# EAGLE board backplane (EAGLE 6.4), part 1 of 3
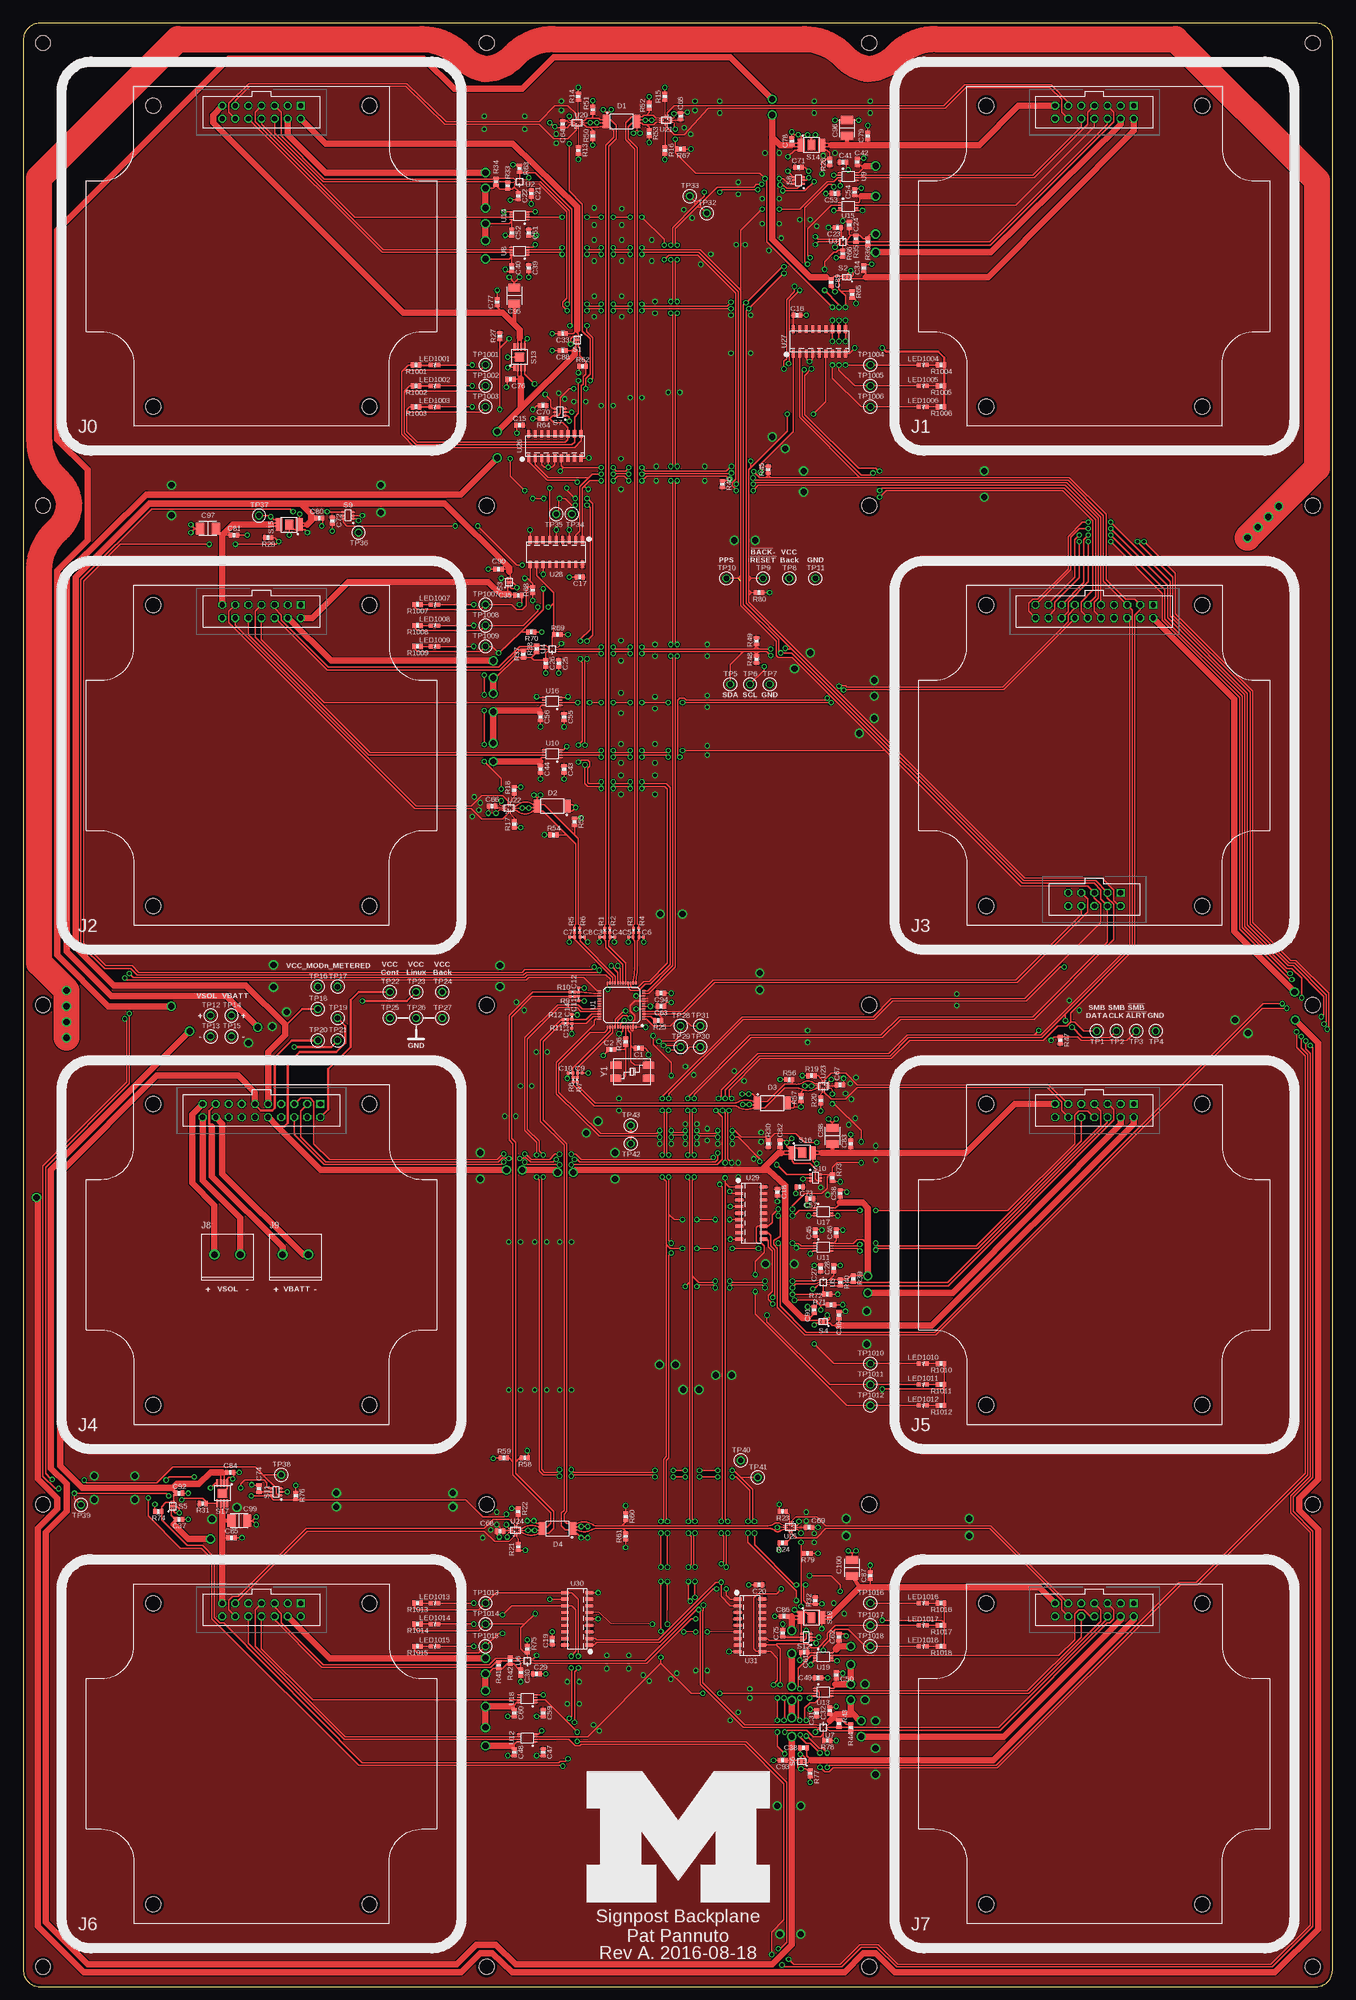
[diagram p0: board, top side]
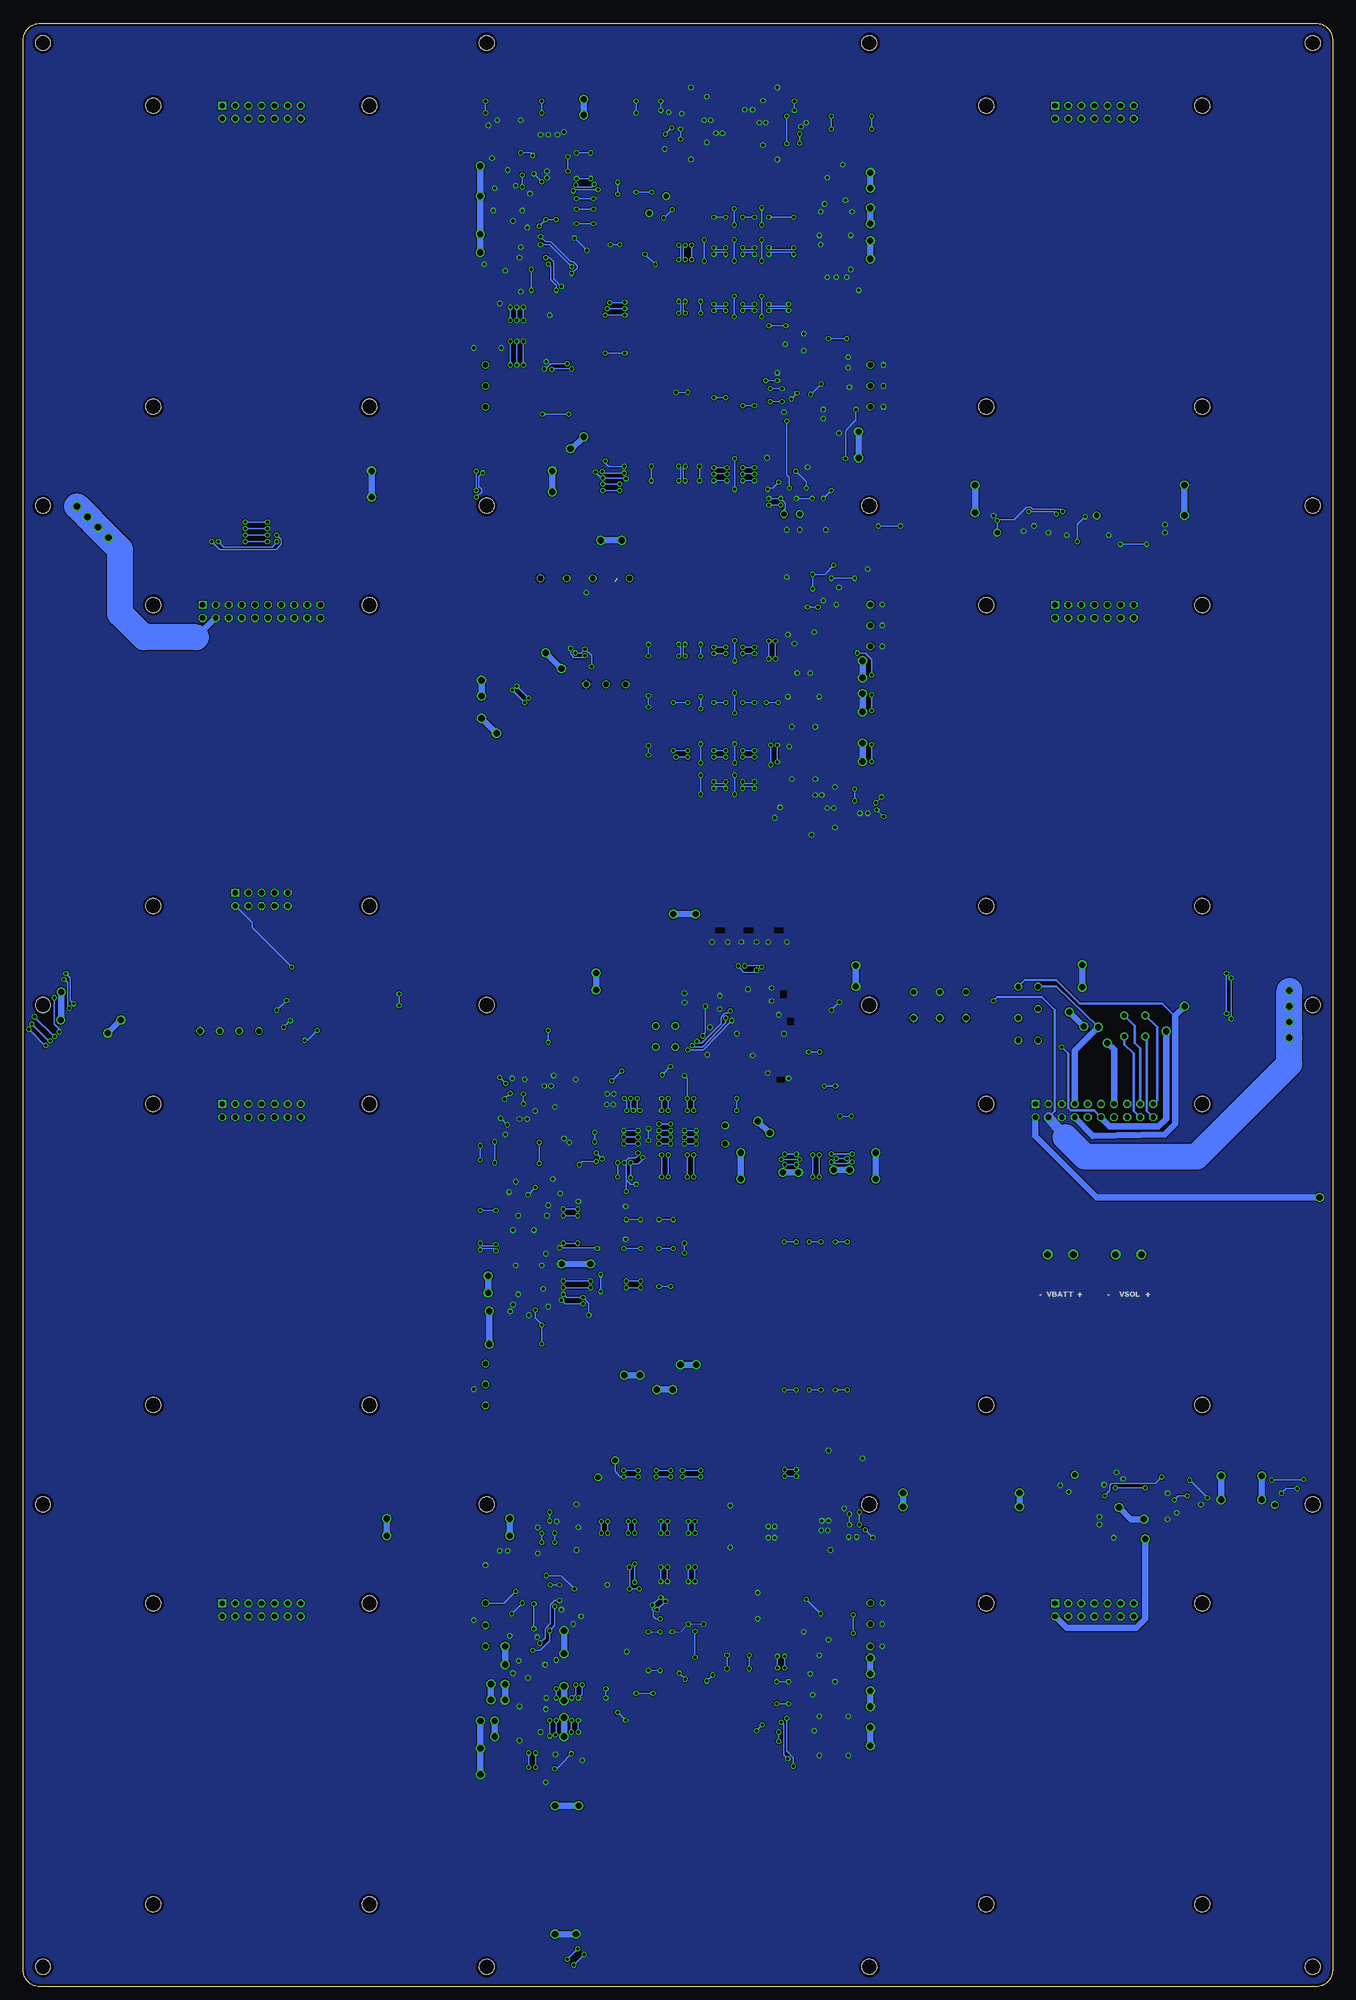
[diagram p1: board, bottom side, seen from below]

Size 254 x 381 mm. Coordinates in mm from the lower left corner, seen from the top.
Outline: 0,377.82 0,3.17 arc90 3.17,0 250.82,0 arc90 254,3.17 254,377.76 arc90 250.76,381 3.17,381 arc90 0,377.82
Copper layers (1*16): Top 0.0178mm / dielectric 59mil / Bottom 0.0178mm
Design rules "sunstone-2lyr_v1.0.0.3 *": minimum track width 6mil, minimum drill 14mil, track to track 6mil, track to pad 6mil, pad to pad 6mil, via to via 6mil, smd to smd 6mil, copper to edge 20mil, drill to drill 16mil, minimum pad ring 8mil, minimum via ring 8mil, stop-mask expansion 3mil, vias tented up to drill 50mil, thermal gap 10mil
Holes 2.95 mm at 3.81,3.81 250.19,3.81 250.19,377.19 3.81,377.19 89.87,377.19 164.13,377.19 3.81,287.38 89.87,287.38 164.13,287.38 250.19,287.38 3.81,190.5 89.87,190.5 164.13,190.5 250.19,190.5 3.81,93.62 89.87,93.62 164.13,93.62 250.19,93.62 89.87,3.81 164.13,3.81
tRestrict: area 120.2,191.5 to 120.5,191.5; area 118,186.1 to 118.1,186.4

## Footprints (pad centres in the part's own frame; a part is rotated, then mirrored left to right if it is on the bottom)
0603_CAP = smd 0.7 x 1: 1 -0.65,0; 2 0.65,0
0402_CAP = smd 0.536 x 0.546: 1 -0.433,0; 2 0.433,0
1210_CAP = smd 2.4 x 1.6: 1 0,1.55; 2 0,-1.55
TSSOP-8 = smd 1.5 x 0.45: 1 -2.9,0.975; 2 -2.9,0.325; 3 -2.9,-0.325; 4 -2.9,-0.975; 5 2.9,-0.975; 6 2.9,-0.325; 7 2.9,0.325; 8 2.9,0.975
BACKPLANE_MODULE_14PIN = drill 1.016 square: 1 7.62,29.21 | drill 1.016 octagon: 2 7.62,26.67; 3 5.08,29.21; 4 5.08,26.67; 5 2.54,29.21; 6 2.54,26.67; 7 0,29.21; 8 0,26.67; 9 -2.54,29.21; 10 -2.54,26.67; 11 -5.08,29.21; 12 -5.08,26.67; 13 -7.62,29.21; 14 -7.62,26.67 | hole 2.946: -20.955,29.21; 20.955,29.21; 20.955,-29.21; -20.955,-29.21
BACKPLANE_MODULE_20PIN_10PIN = drill 1.016 square: 1 11.43,29.21; 21 5.08,-26.67 | drill 1.016 octagon: 2 11.43,26.67; 3 8.89,29.21; 4 8.89,26.67; 5 6.35,29.21; 6 6.35,26.67; 7 3.81,29.21; 8 3.81,26.67; 9 1.27,29.21; 10 1.27,26.67; 11 -1.27,29.21; 12 -1.27,26.67; 13 -3.81,29.21; 14 -3.81,26.67; 15 -6.35,29.21; 16 -6.35,26.67; 17 -8.89,29.21; 18 -8.89,26.67; 19 -11.43,29.21; 20 -11.43,26.67; 22 5.08,-29.21; 23 2.54,-26.67; 24 2.54,-29.21; 25 0,-26.67; 26 0,-29.21; 27 -2.54,-26.67; 28 -2.54,-29.21; 29 -5.08,-26.67; 30 -5.08,-29.21 | hole 2.946: -20.955,29.21; 20.955,29.21; 20.955,-29.21; -20.955,-29.21
BACKPLANE_MODULE_20PIN = drill 1.016 square: 1 11.43,29.21 | drill 1.016 octagon: 2 11.43,26.67; 3 8.89,29.21; 4 8.89,26.67; 5 6.35,29.21; 6 6.35,26.67; 7 3.81,29.21; 8 3.81,26.67; 9 1.27,29.21; 10 1.27,26.67; 11 -1.27,29.21; 12 -1.27,26.67; 13 -3.81,29.21; 14 -3.81,26.67; 15 -6.35,29.21; 16 -6.35,26.67; 17 -8.89,29.21; 18 -8.89,26.67; 19 -11.43,29.21; 20 -11.43,26.67 | hole 2.946: -20.955,29.21; 20.955,29.21; 20.955,-29.21; -20.955,-29.21
PHEONIX-1935161 = drill 1.3: 1 0,0; 2 5,0
LED-0603 = smd 0.8 x 0.8: A 0,-0.75; C 0,0.75
0402_RES-HIGH_SPEED = smd 0.536 x 0.546: 1 -0.433,0; 2 0.433,0
0603-RES = smd 0.7 x 1: 1 -0.65,0; 2 0.65,0
TDFN4 = smd 0.3 x 0.55: 1 -0.25,-0.725; 2 0.25,-0.725; 3 0.25,0.725; 4 -0.25,0.725 | smd 0.86 x 0.5: PAD 0,0
SC70-6 = smd 0.4 x 0.5: 1 -0.65,-0.95; 2 0,-0.95; 3 0.65,-0.95; 4 0.65,0.95; 5 0,0.95; 6 -0.65,0.95
MSOP-8EP = smd 0.45 x 1.35: 1 -0.975,-1.975; 2 -0.325,-1.975; 3 0.325,-1.975; 4 0.975,-1.975; 5 0.975,1.975; 6 0.325,1.975; 7 -0.325,1.975; 8 -0.975,1.975 | smd 2 x 1.7: PAD 0,0
TESTPOINT_0.040IN = drill 1.016: TESTPOINT 0,0
LQFP-48 = smd 0.3 x 0.6: 1 -2.75,-4.3; 2 -2.25,-4.3; 3 -1.75,-4.3; 4 -1.25,-4.3; 5 -0.75,-4.3; 6 -0.25,-4.3; 7 0.25,-4.3; 8 0.75,-4.3; 9 1.25,-4.3; 10 1.75,-4.3; 11 2.25,-4.3; 12 2.75,-4.3; 25 2.75,4.3; 26 2.25,4.3; 27 1.75,4.3; 28 1.25,4.3; 29 0.75,4.3; 30 0.25,4.3; 31 -0.25,4.3; 32 -0.75,4.3; 33 -1.25,4.3; 34 -1.75,4.3; 35 -2.25,4.3; 36 -2.75,4.3 | smd 0.6 x 0.3: 13 4.3,-2.75; 14 4.3,-2.25; 15 4.3,-1.75; 16 4.3,-1.25; 17 4.3,-0.75; 18 4.3,-0.25; 19 4.3,0.25; 20 4.3,0.75; 21 4.3,1.25; 22 4.3,1.75; 23 4.3,2.25; 24 4.3,2.75; 37 -4.3,2.75; 38 -4.3,2.25; 39 -4.3,1.75; 40 -4.3,1.25; 41 -4.3,0.75; 42 -4.3,0.25; 43 -4.3,-0.25; 44 -4.3,-0.75; 45 -4.3,-1.25; 46 -4.3,-1.75; 47 -4.3,-2.25; 48 -4.3,-2.75
UMLP-8 = smd 0.35 x 0.25: 1 -0.55,0; 5 0.55,0 | smd 0.24 x 0.35: 2 -0.4,-0.625; 3 0,-0.625; 4 0.4,-0.625; 6 0.4,0.625; 7 0,0.625; 8 -0.4,0.625
VFSOP-8 = smd 0.25 x 0.75: 1 -0.75,-1.55; 2 -0.25,-1.55; 3 0.25,-1.55; 4 0.75,-1.55; 5 0.75,1.55; 6 0.25,1.55; 7 -0.25,1.55; 8 -0.75,1.55
UQFN-10 = smd 0.2 x 0.9: 1 -0.2,-0.65 | smd 0.2 x 0.8: 2 0.2,-0.7; 6 0.2,0.7; 7 -0.2,0.7 | smd 0.8 x 0.2: 3 0.9,-0.4; 4 0.9,0; 5 0.9,0.4; 8 -0.9,0.4; 9 -0.9,0; 10 -0.9,-0.4
SOIC-18 = smd 0.635 x 1.524: 1 -5.08,-2.362; 2 -3.81,-2.362; 3 -2.54,-2.362; 4 -1.27,-2.362; 5 0,-2.362; 6 1.27,-2.362; 7 2.54,-2.362; 8 3.81,-2.362; 9 5.08,-2.362; 10 5.08,2.362; 11 3.81,2.362; 12 2.54,2.362; 13 1.27,2.362; 14 0,2.362; 15 -1.27,2.362; 16 -2.54,2.362; 17 -3.81,2.362; 18 -5.08,2.362
ABMM = smd 2.21 x 1.397: 1 -3.167,-1.27; 3 3.15,1.27; NC1 -3.15,1.27; NC2 3.15,-1.27

## Placement (x,y rotation side)
C1  22pF, 5% tol  [0603_CAP]  119.38,182.12 180 top
C2  22pF, 5% tol  [0603_CAP]  114.05,181.86 0 top
C3  22pF  [0402_CAP]  112.27,203.71 180 top
C4  22pF  [0402_CAP]  114.3,203.71 0 top
C5  22pF  [0402_CAP]  117.86,203.71 180 top
C6  22pF  [0402_CAP]  119.89,203.71 0 top
C7  22pF  [0402_CAP]  106.43,203.71 180 top
C8  22pF  [0402_CAP]  108.46,203.71 0 top
C9  22pF  [0402_CAP]  107.95,177.29 0 top
C10  22pF  [0402_CAP]  106.17,177.29 180 top
C11  22pF  [0402_CAP]  107.7,191.77 270 top
C12  22pF  [0402_CAP]  107.7,193.42 90 top
C13  22pF  [0402_CAP]  106.43,186.44 270 top
C14  22pF  [0402_CAP]  106.43,188.21 90 top
C15  100nF  [0603_CAP]  96.27,303.02 180 top
C16  100nF  [0603_CAP]  150.11,324.36 0 top
C17  100nF  [0603_CAP]  107.95,273.56 180 top
C18  100nF  [0603_CAP]  146.3,154.18 270 top
C19  100nF  [0603_CAP]  102.62,67.06 90 top
C20  100nF  [0603_CAP]  142.75,77.98 180 top
C21  100nF  [0603_CAP]  98.55,347.98 270 top
C22  100nF  [0603_CAP]  96.01,347.47 270 top
C23  100nF  [0603_CAP]  157.99,341.38 180 top
C24  100nF  [0603_CAP]  160.27,341.88 90 top
C25  100nF  [0603_CAP]  103.89,256.79 270 top
C26  100nF  [0603_CAP]  101.35,256.79 270 top
C27  100nF  [0603_CAP]  154.69,139.45 90 top
C28  100nF  [0603_CAP]  157.23,139.45 90 top
C29  100nF  [0603_CAP]  99.57,60.71 0 top
C30  100nF  [0603_CAP]  96.52,60.96 270 top
C31  100nF  [0603_CAP]  153.92,53.09 90 top
C32  100nF  [0603_CAP]  156.46,53.59 90 top
C33  100nF  [0603_CAP]  104.65,320.8 180 top
C34  100nF  [0603_CAP]  163.07,333.5 90 top
C35  100nF  [0603_CAP]  96.01,270 0 top
C36  100nF  [0603_CAP]  158.24,130.3 90 top
C37  100nF  [0603_CAP]  30.23,90.68 0 top
C38  100nF  [0603_CAP]  151.38,46.35 180 top
C39  100nF  [0603_CAP]  98.04,333.5 270 top
C40  100nF  [0603_CAP]  94.74,333.5 270 top
C41  100nF  [0603_CAP]  159,354.08 0 top
C42  100nF  [0603_CAP]  161.8,354.08 90 top
C43  100nF  [0603_CAP]  104.9,236.22 270 top
C44  100nF  [0603_CAP]  100.33,236.22 270 top
C45  100nF  [0603_CAP]  153.67,146.3 90 top
C46  100nF  [0603_CAP]  157.73,146.3 90 top
C47  100nF  [0603_CAP]  100.84,45.47 270 top
C48  100nF  [0603_CAP]  95.25,45.47 270 top
C49  100nF  [0603_CAP]  154.18,59.94 0 top
C50  100nF  [0603_CAP]  157.73,60.45 90 top
C51  100nF  [0603_CAP]  98.04,340.36 270 top
C52  100nF  [0603_CAP]  94.74,340.36 270 top
C53  100nF  [0603_CAP]  157.48,347.98 180 top
C54  100nF  [0603_CAP]  161.29,348.23 90 top
C55  100nF  [0603_CAP]  104.9,246.38 270 top
C56  100nF  [0603_CAP]  100.33,246.38 270 top
C57  100nF  [0603_CAP]  152.65,152.91 180 top
C58  100nF  [0603_CAP]  158.5,153.92 90 top
C59  100nF  [0603_CAP]  100.84,53.09 270 top
C60  100nF  [0603_CAP]  95.25,53.09 270 top
C61  100nF  [0603_CAP]  151.51,64.9 180 top
C62  100nF  [0603_CAP]  158.24,67.82 90 top
C63  100nF  [0603_CAP]  123.7,190.25 180 top
C64  100nF  [0603_CAP]  104.65,361.44 90 top
C65  100nF  [0603_CAP]  127.51,362.97 270 top
C66  100nF  [0603_CAP]  90.93,229.11 0 top
C67  100nF  [0603_CAP]  158.47,175.01 180 top
C68  100nF  [0603_CAP]  92.46,88.39 0 top
C69  100nF  [0603_CAP]  152.4,89.15 180 top
C70  100nF  [0603_CAP]  100.84,306.83 180 top
C71  100nF  [0603_CAP]  150.37,353.06 0 top
C72  100nF  [0603_CAP]  59.94,284.48 270 top
C73  100nF  [0603_CAP]  150.62,155.19 180 top
C74  100nF  [0603_CAP]  45.72,96.65 90 top
C75  100nF  [0603_CAP]  147.32,68.58 90 top
C76  100nF  [0603_CAP]  94.49,311.91 180 top
C77  100nF  [0603_CAP]  91.95,326.9 90 top
C78  100nF  [0603_CAP]  149.1,358.14 90 top
C79  100nF  [0603_CAP]  163.83,359.16 90 top
C80  100nF  [0603_CAP]  57.4,284.99 0 top
C81  100nF  [0603_CAP]  40.89,281.69 0 top
C82  100nF  [0603_CAP]  146.81,163.58 90 top
C83  100nF  [0603_CAP]  160.53,163.58 90 top
C84  100nF  [0603_CAP]  40.13,99.82 0 top
C85  100nF  [0603_CAP]  40.39,87.12 0 top
C86  100nF  [0603_CAP]  147.57,71.88 180 top
C87  100nF  [0603_CAP]  164.34,79.76 90 top
C88  4.7uF  [0603_CAP]  104.65,317.5 180 top
C89  4.7uF  [0603_CAP]  156.72,330.71 270 top
C90  4.7uF  [0603_CAP]  92.2,275.08 180 top
C91  4.7uF  [0603_CAP]  153.42,131.32 90 top
C92  4.7uF  [0603_CAP]  30.23,95.76 0 top
C93  4.7uF  [0603_CAP]  147.32,43.94 180 top
C94  4.7uF  [0603_CAP]  123.7,192.79 180 top
C95  150uF  [1210_CAP]  95.25,328.17 180 top
C96  150uF  [1210_CAP]  159.77,360.68 180 top
C97  150uF  [1210_CAP]  35.81,282.96 270 top
C98  150uF  [1210_CAP]  156.97,165.1 180 top
C99  150uF  [1210_CAP]  41.91,90.42 90 top
C100  150uF  [1210_CAP]  160.78,81.28 180 top
D1  SN75240-TSSOP  [TSSOP-8]  116.08,361.95 0 top
D2  SN75240-TSSOP  [TSSOP-8]  102.62,229.11 180 top
D3  SN75240-TSSOP  [TSSOP-8]  145.29,171.45 0 top
D4  SN75240-TSSOP  [TSSOP-8]  103.63,88.9 180 top
J0  BACKPLANE_GENERIC_MODULE  [BACKPLANE_MODULE_14PIN]  46.2,335.81 0 top
J1  BACKPLANE_GENERIC_MODULE  [BACKPLANE_MODULE_14PIN]  207.8,335.81 0 top
J2  BACKPLANE_GENERIC_MODULE  [BACKPLANE_MODULE_14PIN]  46.2,238.94 0 top
J3  BACKPLANE_CONTROLLER_MODULE  [BACKPLANE_MODULE_20PIN_10PIN]  207.8,238.94 0 top
J4  BACKPLANE_POWER_MODULE  [BACKPLANE_MODULE_20PIN]  46.2,142.06 0 top
J5  BACKPLANE_GENERIC_MODULE  [BACKPLANE_MODULE_14PIN]  207.8,142.06 0 top
J6  BACKPLANE_GENERIC_MODULE  [BACKPLANE_MODULE_14PIN]  46.2,45.19 0 top
J7  BACKPLANE_GENERIC_MODULE  [BACKPLANE_MODULE_14PIN]  207.8,45.19 0 top
J8  SCREW_TERMINAL  [PHEONIX-1935161]  37.08,142.06 0 top
J9  SCREW_TERMINAL  [PHEONIX-1935161]  50.29,142.06 0 top
LED1001  LED0603  [LED-0603]  79.76,314.71 270 top
LED1002  LED0603  [LED-0603]  79.76,310.64 270 top
LED1003  LED0603  [LED-0603]  79.76,306.58 270 top
LED1004  LED0603  [LED-0603]  174.5,314.71 270 top
LED1005  LED0603  [LED-0603]  174.5,310.64 270 top
LED1006  LED0603  [LED-0603]  174.5,306.58 270 top
LED1007  LED0603  [LED-0603]  79.76,268.22 270 top
LED1008  LED0603  [LED-0603]  79.76,264.16 270 top
LED1009  LED0603  [LED-0603]  79.76,260.1 270 top
LED1010  LED0603  [LED-0603]  174.5,120.9 270 top
LED1011  LED0603  [LED-0603]  174.5,116.84 270 top
LED1012  LED0603  [LED-0603]  174.5,112.78 270 top
LED1013  LED0603  [LED-0603]  79.76,74.42 270 top
LED1014  LED0603  [LED-0603]  79.76,70.36 270 top
LED1015  LED0603  [LED-0603]  79.76,66.04 270 top
LED1016  LED0603  [LED-0603]  174.5,74.42 270 top
LED1017  LED0603  [LED-0603]  174.5,70.1 270 top
LED1018  LED0603  [LED-0603]  174.5,66.04 270 top
LOGO1  UMICH_SOLID_GIANT  [UMICH_SOLID_1000MIL]  109.35,16.38 0 top
R1  27Ω  [0402_RES-HIGH_SPEED]  112.78,204.98 90 top
R2  27Ω  [0402_RES-HIGH_SPEED]  113.79,204.98 90 top
R3  27Ω  [0402_RES-HIGH_SPEED]  118.36,204.98 90 top
R4  27Ω  [0402_RES-HIGH_SPEED]  119.38,204.98 90 top
R5  27Ω  [0402_RES-HIGH_SPEED]  106.93,204.98 90 top
R6  27Ω  [0402_RES-HIGH_SPEED]  107.95,204.98 90 top
R7  27Ω  [0402_RES-HIGH_SPEED]  107.44,176.02 270 top
R8  27Ω  [0402_RES-HIGH_SPEED]  106.68,176.02 270 top
R9  27Ω  [0402_RES-HIGH_SPEED]  106.55,192.15 180 top
R10  27Ω  [0402_RES-HIGH_SPEED]  106.55,193.04 180 top
R11  27Ω  [0402_RES-HIGH_SPEED]  105.16,186.94 180 top
R12  27Ω  [0402_RES-HIGH_SPEED]  105.16,187.71 180 top
R13  50Ω  [0603-RES]  107.7,356.36 270 top
R14  50Ω  [0603-RES]  107.7,366.78 90 top
R15  50Ω  [0603-RES]  124.46,366.78 90 top
R16  50Ω  [0603-RES]  124.46,356.36 270 top
R17  50Ω  [0603-RES]  95.25,225.55 270 top
R18  50Ω  [0603-RES]  95.25,232.16 90 top
R19  50Ω  [0603-RES]  152.91,176.78 180 top
R20  50Ω  [0603-RES]  154.69,171.96 270 top
R21  50Ω  [0603-RES]  96.01,85.34 270 top
R22  50Ω  [0603-RES]  96.01,92.2 90 top
R23  50Ω  [0603-RES]  147.32,92.2 180 top
R24  50Ω  [0603-RES]  147.32,86.11 180 top
R25  1.5kΩ  [0603-RES]  123.19,187.45 180 top
R26  1.5kΩ  [0603-RES]  116.84,183.39 90 top
R27  10kΩ  [0603-RES]  92.46,320.29 90 top
R28  10kΩ  [0603-RES]  156.46,354.08 270 top
R29  10kΩ  [0603-RES]  47.5,281.18 180 top
R30  10kΩ  [0603-RES]  144.53,163.58 270 top
R31  10kΩ  [0603-RES]  34.8,93.73 180 top
R32  10kΩ  [0603-RES]  153.67,74.93 90 top
R33  10kΩ  [0603-RES]  93.98,349.5 90 top
R34  10kΩ  [0603-RES]  91.69,350.27 90 top
R35  10kΩ  [0603-RES]  161.54,339.22 270 top
R36  10kΩ  [0603-RES]  163.83,338.58 270 top
R37  10kΩ  [0603-RES]  97.03,258.57 90 top
R38  10kΩ  [0603-RES]  99.57,259.59 90 top
R39  10kΩ  [0603-RES]  161.04,137.41 270 top
R40  10kΩ  [0603-RES]  158.5,136.65 270 top
R41  10kΩ  [0603-RES]  92.2,62.36 90 top
R42  10kΩ  [0603-RES]  94.49,63.25 90 top
R43  10kΩ  [0603-RES]  158.24,51.05 270 top
R44  10kΩ  [0603-RES]  160.53,50.29 270 top
R45  10kΩ  [0603-RES]  144.53,294.39 90 top
R46  10kΩ  [0603-RES]  135.64,291.59 270 top
R47  10kΩ  [0603-RES]  201.17,183.64 270 top
R48  10kΩ  [0603-RES]  142.24,257.56 270 top
R49  10kΩ  [0603-RES]  142.24,261.11 90 top
R50  15kΩ  [0603-RES]  110.49,359.16 90 top
R51  15kΩ  [0603-RES]  110.49,364.24 270 top
R52  15kΩ  [0603-RES]  121.41,365 270 top
R53  15kΩ  [0603-RES]  121.41,359.66 90 top
R54  15kΩ  [0603-RES]  102.87,223.52 0 top
R55  15kΩ  [0603-RES]  106.93,226.06 270 top
R56  15kΩ  [0603-RES]  148.59,176.02 0 top
R57  15kΩ  [0603-RES]  150.88,172.47 90 top
R58  15kΩ  [0603-RES]  97.28,102.62 180 top
R59  15kΩ  [0603-RES]  93.22,102.62 0 top
R60  15kΩ  [0603-RES]  116.84,91.19 270 top
R61  15kΩ  [0603-RES]  116.84,87.38 90 top
R62  10MΩ  [0603-RES]  108.46,314.45 0 top
R63  10MΩ  [0603-RES]  96.27,352.81 270 top
R64  10MΩ  [0603-RES]  100.84,304.29 0 top
R65  10MΩ  [0603-RES]  160.78,328.42 90 top
R66  10MΩ  [0603-RES]  159,336.3 90 top
R67  10MΩ  [0603-RES]  127.51,356.62 180 top
R68  10MΩ  [0603-RES]  98.81,271.02 90 top
R69  10MΩ  [0603-RES]  103.63,262.38 180 top
R70  10MΩ  [0603-RES]  98.55,262.89 180 top
R71  10MΩ  [0603-RES]  156.72,132.33 180 top
R72  10MΩ  [0603-RES]  155.96,134.37 180 top
R73  10MΩ  [0603-RES]  156.97,156.97 90 top
R74  10MΩ  [0603-RES]  26.16,92.2 0 top
R75  10MΩ  [0603-RES]  97.79,65.53 270 top
R76  10MΩ  [0603-RES]  52.83,95.25 270 top
R77  10MΩ  [0603-RES]  152.65,41.4 90 top
R78  10MΩ  [0603-RES]  155.96,47.75 180 top
R79  10MΩ  [0603-RES]  152.15,84.07 180 top
R80  10MΩ  [0603-RES]  142.75,270.51 180 top
R1001  15Ω  [0603-RES]  76.2,314.71 180 top
R1002  15Ω  [0603-RES]  76.2,310.64 180 top
R1003  15Ω  [0603-RES]  76.2,306.58 180 top
R1004  15Ω  [0603-RES]  178.05,314.71 180 top
R1005  15Ω  [0603-RES]  178.05,310.64 180 top
R1006  15Ω  [0603-RES]  178.05,306.58 180 top
R1007  15Ω  [0603-RES]  76.45,268.22 180 top
R1008  15Ω  [0603-RES]  76.45,264.16 180 top
R1009  15Ω  [0603-RES]  76.45,260.1 180 top
R1010  15Ω  [0603-RES]  178.05,120.9 180 top
R1011  15Ω  [0603-RES]  178.05,116.84 180 top
R1012  15Ω  [0603-RES]  178.05,112.78 180 top
R1013  15Ω  [0603-RES]  76.45,74.42 180 top
R1014  15Ω  [0603-RES]  76.45,70.36 180 top
R1015  15Ω  [0603-RES]  76.45,66.04 180 top
R1016  15Ω  [0603-RES]  178.05,74.42 180 top
R1017  15Ω  [0603-RES]  178.05,70.1 180 top
R1018  15Ω  [0603-RES]  178.05,66.04 180 top
S1  SIP3240X  [TDFN4]  107.44,319.53 180 top
S2  SIP3240X  [TDFN4]  159.77,331.72 90 top
S3  SIP3240X  [TDFN4]  94.23,272.54 0 top
S4  SIP3240X  [TDFN4]  155.19,129.03 90 top
S5  SIP3240X  [TDFN4]  28.96,93.22 0 top
S6  SIP3240X  [TDFN4]  151,43.69 90 top
S7  NC7SZ157  [SC70-6]  104.14,305.56 90 top
S8  NC7SZ157  [SC70-6]  150.37,350.52 90 top
S9  NC7SZ157  [SC70-6]  62.99,285.5 90 top
S10  NC7SZ157  [SC70-6]  153.67,156.97 270 top
S11  NC7SZ157  [SC70-6]  49.02,96.01 90 top
S12  NC7SZ157  [SC70-6]  151.89,67.82 90 top
S13  AP2401MP  [MSOP-8EP]  96.27,316.23 0 top
S14  AP2401MP  [MSOP-8EP]  152.91,357.38 270 top
S15  AP2401MP  [MSOP-8EP]  51.56,283.72 90 top
S16  AP2401MP  [MSOP-8EP]  151.13,161.8 270 top
S17  AP2401MP  [MSOP-8EP]  38.61,95.76 180 top
S18  AP2401MP  [MSOP-8EP]  152.91,71.63 270 top
TP1  TEST_POINT_0.040IN  [TESTPOINT_0.040IN]  208.28,185.42 0 top
TP2  TEST_POINT_0.040IN  [TESTPOINT_0.040IN]  212.09,185.42 0 top
TP3  TEST_POINT_0.040IN  [TESTPOINT_0.040IN]  215.9,185.42 0 top
TP4  TEST_POINT_0.040IN  [TESTPOINT_0.040IN]  219.71,185.42 0 top
TP5  TEST_POINT_0.040IN  [TESTPOINT_0.040IN]  137.16,252.73 0 top
TP6  TEST_POINT_0.040IN  [TESTPOINT_0.040IN]  140.97,252.73 0 top
TP7  TEST_POINT_0.040IN  [TESTPOINT_0.040IN]  144.78,252.73 0 top
TP8  TEST_POINT_0.040IN  [TESTPOINT_0.040IN]  148.59,273.3 0 top
TP9  TEST_POINT_0.040IN  [TESTPOINT_0.040IN]  143.51,273.3 0 top
TP10  TEST_POINT_0.040IN  [TESTPOINT_0.040IN]  136.4,273.3 0 top
TP11  TEST_POINT_0.040IN  [TESTPOINT_0.040IN]  153.67,273.3 0 top
TP12  TEST_POINT_0.040IN  [TESTPOINT_0.040IN]  36.32,188.47 0 top
TP13  TEST_POINT_0.040IN  [TESTPOINT_0.040IN]  36.32,184.4 0 top
TP14  TEST_POINT_0.040IN  [TESTPOINT_0.040IN]  40.39,188.47 0 top
TP15  TEST_POINT_0.040IN  [TESTPOINT_0.040IN]  40.39,184.4 0 top
TP16  TEST_POINT_0.040IN  [TESTPOINT_0.040IN]  57.15,194.06 0 top
TP17  TEST_POINT_0.040IN  [TESTPOINT_0.040IN]  60.96,194.06 0 top
TP18  TEST_POINT_0.040IN  [TESTPOINT_0.040IN]  57.15,189.74 0 top
TP19  TEST_POINT_0.040IN  [TESTPOINT_0.040IN]  60.96,187.96 0 top
TP20  TEST_POINT_0.040IN  [TESTPOINT_0.040IN]  57.15,183.64 0 top
TP21  TEST_POINT_0.040IN  [TESTPOINT_0.040IN]  60.96,183.64 0 top
TP22  TEST_POINT_0.040IN  [TESTPOINT_0.040IN]  71.12,193.04 0 top
TP23  TEST_POINT_0.040IN  [TESTPOINT_0.040IN]  76.2,193.04 0 top
TP24  TEST_POINT_0.040IN  [TESTPOINT_0.040IN]  81.28,193.04 0 top
TP25  TEST_POINT_0.040IN  [TESTPOINT_0.040IN]  71.12,187.96 0 top
TP26  TEST_POINT_0.040IN  [TESTPOINT_0.040IN]  76.2,187.96 0 top
TP27  TEST_POINT_0.040IN  [TESTPOINT_0.040IN]  81.28,187.96 0 top
TP28  TEST_POINT_0.040IN  [TESTPOINT_0.040IN]  127.51,186.44 0 top
TP29  TEST_POINT_0.040IN  [TESTPOINT_0.040IN]  127.51,182.37 0 top
TP30  TEST_POINT_0.040IN  [TESTPOINT_0.040IN]  131.32,182.37 0 top
TP31  TEST_POINT_0.040IN  [TESTPOINT_0.040IN]  131.32,186.44 0 top
TP32  TEST_POINT_0.040IN  [TESTPOINT_0.040IN]  132.59,344.17 0 top
TP33  TEST_POINT_0.040IN  [TESTPOINT_0.040IN]  129.29,347.47 0 top
TP34  TEST_POINT_0.040IN  [TESTPOINT_0.040IN]  106.43,285.75 0 top
TP35  TEST_POINT_0.040IN  [TESTPOINT_0.040IN]  103.38,285.75 0 top
TP36  TEST_POINT_0.040IN  [TESTPOINT_0.040IN]  65.02,282.19 180 top
TP37  TEST_POINT_0.040IN  [TESTPOINT_0.040IN]  45.72,285.5 0 top
TP38  TEST_POINT_0.040IN  [TESTPOINT_0.040IN]  50.04,99.31 0 top
TP39  TEST_POINT_0.040IN  [TESTPOINT_0.040IN]  11.18,93.47 180 top
TP40  TEST_POINT_0.040IN  [TESTPOINT_0.040IN]  139.19,102.11 0 top
TP41  TEST_POINT_0.040IN  [TESTPOINT_0.040IN]  142.49,98.81 0 top
TP42  TEST_POINT_0.040IN  [TESTPOINT_0.040IN]  117.86,163.58 180 top
TP43  TEST_POINT_0.040IN  [TESTPOINT_0.040IN]  117.86,167.13 0 top
TP1001  TEST_POINT_0.040IN  [TESTPOINT_0.040IN]  89.66,314.71 0 top
TP1002  TEST_POINT_0.040IN  [TESTPOINT_0.040IN]  89.66,310.64 0 top
TP1003  TEST_POINT_0.040IN  [TESTPOINT_0.040IN]  89.66,306.58 0 top
TP1004  TEST_POINT_0.040IN  [TESTPOINT_0.040IN]  164.34,314.71 0 top
TP1005  TEST_POINT_0.040IN  [TESTPOINT_0.040IN]  164.34,310.64 0 top
TP1006  TEST_POINT_0.040IN  [TESTPOINT_0.040IN]  164.34,306.58 0 top
TP1007  TEST_POINT_0.040IN  [TESTPOINT_0.040IN]  89.66,268.22 0 top
TP1008  TEST_POINT_0.040IN  [TESTPOINT_0.040IN]  89.66,264.16 0 top
TP1009  TEST_POINT_0.040IN  [TESTPOINT_0.040IN]  89.66,260.1 0 top
TP1010  TEST_POINT_0.040IN  [TESTPOINT_0.040IN]  164.34,120.9 0 top
TP1011  TEST_POINT_0.040IN  [TESTPOINT_0.040IN]  164.34,116.84 0 top
TP1012  TEST_POINT_0.040IN  [TESTPOINT_0.040IN]  164.34,112.78 0 top
TP1013  TEST_POINT_0.040IN  [TESTPOINT_0.040IN]  89.66,74.42 0 top
TP1014  TEST_POINT_0.040IN  [TESTPOINT_0.040IN]  89.66,70.36 0 top
TP1015  TEST_POINT_0.040IN  [TESTPOINT_0.040IN]  89.66,66.04 0 top
TP1016  TEST_POINT_0.040IN  [TESTPOINT_0.040IN]  164.34,74.42 0 top
TP1017  TEST_POINT_0.040IN  [TESTPOINT_0.040IN]  164.34,70.1 0 top
TP1018  TEST_POINT_0.040IN  [TESTPOINT_0.040IN]  164.34,66.04 0 top
U1  TUSB2077A  [LQFP-48]  116.08,190.5 90 top
U2  FXMA2102  [UMLP-8]  96.27,350.27 90 top
U3  FXMA2102  [UMLP-8]  159,338.58 270 top
U4  FXMA2102  [UMLP-8]  102.62,259.59 90 top
U5  FXMA2102  [UMLP-8]  155.19,136.65 270 top
U6  FXMA2102  [UMLP-8]  97.79,63.25 90 top
U7  FXMA2102  [UMLP-8]  155.19,50.29 270 top
U8  SN74LVC2T45  [VFSOP-8]  96.27,336.8 90 top
U9  SN74LVC2T45  [VFSOP-8]  160.02,351.28 270 top
U10  SN74LVC2T45  [VFSOP-8]  102.62,239.27 90 top
U11  SN74LVC2T45  [VFSOP-8]  155.19,143.51 270 top
U12  SN74LVC2T45  [VFSOP-8]  97.79,48.26 90 top
U13  SN74LVC2T45  [VFSOP-8]  155.19,57.15 270 top
U14  SN74LVC2T45  [VFSOP-8]  96.27,343.66 90 top
U15  SN74LVC2T45  [VFSOP-8]  160.02,345.44 270 top
U16  SN74LVC2T45  [VFSOP-8]  102.62,249.43 90 top
U17  SN74LVC2T45  [VFSOP-8]  155.19,150.37 270 top
U18  SN74LVC2T45  [VFSOP-8]  97.79,55.88 90 top
U19  SN74LVC2T45  [VFSOP-8]  155.19,64.01 270 top
U20  TS3USB30E  [UQFN-10]  107.44,361.7 0 top
U21  TS3USB30E  [UQFN-10]  124.71,362.2 180 top
U22  TS3USB30E  [UQFN-10]  94.23,228.73 0 top
U23  TS3USB30E  [UQFN-10]  155.19,174.75 180 top
U24  TS3USB30E  [UQFN-10]  95.5,88.52 0 top
U25  TS3USB30E  [UQFN-10]  148.84,89.15 180 top
U26  MCP23008  [SOIC-18]  103.12,298.96 0 top
U27  MCP23008  [SOIC-18]  154.43,319.28 0 top
U28  MCP23008  [SOIC-18]  103.38,278.38 180 top
U29  MCP23008  [SOIC-18]  141.22,150.11 270 top
U30  MCP23008  [SOIC-18]  107.44,71.37 90 top
U31  MCP23008  [SOIC-18]  140.97,70.1 270 top
Y1  ABMM  [ABMM]  118.11,177.55 0 top

## Library data of the parts
C1 C2 = passives; DIGIKEY: 1276-1023-1-ND
C3-C94 R1-R80 R1001-R1018 = passives
C95-C100 = passives; DIGIKEY: 1276-3367-1-ND
D1-D4 = signpost; DIGIKEY: 296-6596-1-ND
J0 J1 J2 J5-J7 = signpost; DIGIKEY: S9195-ND
J3 = signpost; DIGIKEY: S9197-ND , S9194-ND
J4 = signpost; DIGIKEY: S9197-ND
J8 J9 = connector; DIGIKEY: 277-1667-ND
LED1001-LED1018 = leds
LOGO1 = logos
S1-S6 = signpost; DIGIKEY: SIP32402ADNP-T1GE4CT-ND
S7-S12 = signpost; DIGIKEY: NC7SZ157P6XCT-ND
S13-S18 = signpost; DIGIKEY: AP2401MP-13DICT-ND
TP1-TP43 TP1001-TP1018 = headers; DIGIKEY: 5001K-ND
U1 = signpost; DIGIKEY: 296-37871-1-ND
U2-U7 = signpost; DIGIKEY: FXMA2102UMXCT-ND
U8-U19 = signpost; DIGIKEY: 296-17014-1-ND
U20-U25 = signpost; DIGIKEY: 296-24684-1-ND
U26-U31 = signpost; DIGIKEY: MCP23008T-E/SOCT-ND
Y1 = crystals; DIGIKEY: 535-10156-1-ND

## Nets
!BACKPLANE_RESET: J3.22 R80.2 TP9.TESTPOINT U1.6 U26.6 U27.6 U28.6 U29.6 U30.6 U31.6
!SMBALERT: J3.6 J4.6 R47.1 TP3.TESTPOINT
CONT_MOD0_IN: J3.9 U8.2
CONT_MOD0_OUT: J3.10 U14.2
CONT_MOD1_IN: J3.11 U9.2
CONT_MOD1_OUT: J3.12 U15.2
CONT_MOD2_IN: J3.13 U10.2
CONT_MOD2_OUT: J3.14 U16.2
CONT_MOD5_IN: J3.15 U11.2
CONT_MOD5_OUT: J3.16 U17.2
CONT_MOD6_IN: J3.17 U12.2
CONT_MOD6_OUT: J3.18 U18.2
CONT_MOD7_IN: J3.19 U13.2
CONT_MOD7_OUT: J3.20 U19.2
CONT_USB+: J3.27 R25.1 U1.3
CONT_USB-: J3.28 U1.4
GND: C1.1 C2.1 C3.2 C4.2 C5.2 C6.2 C7.2 C8.2 C9.2 C10.2 C11.2 C12.2 C13.2 C14.2 C15.2 C16.2 C17.2 C18.2 C19.2 C20.2 C21.2 C22.2 C23.2 C24.2 C25.2 C26.2 C27.2 C28.2 C29.2 C30.2 C31.2 C32.2 C33.2 C34.2 C35.2 C36.2 C37.2 C38.2 C39.2 C40.2 C41.2 C42.2 C43.2 C44.2 C45.2 C46.2 C47.2 C48.2 C49.2 C50.2 C51.2 C52.2 C53.2 C54.2 C55.2 C56.2 C57.2 C58.2 C59.2 C60.2 C61.2 C62.2 C63.1 C64.1 C65.1 C66.1 C67.1 C68.1 C69.1 C70.2 C71.2 C72.2 C73.2 C74.2 C75.2 C76.2 C77.2 C78.2 C79.2 C80.2 C81.2 C82.2 C83.2 C84.2 C85.2 C86.2 C87.2 C88.2 C89.2 C90.2 C91.2 C92.2 C93.2 C94.1 C95.2 C96.2 C97.2 C98.2 C99.2 C100.2 D1.1 D1.3 D1.5 D1.7 D2.1 D2.3 D2.5 D2.7 D3.1 D3.3 D3.5 D3.7 D4.1 D4.3 D4.5 D4.7 J0.1 J0.14 J1.1 J1.14 J2.1 J2.14 J3.1 J3.21 J4.1 J5.1 J5.14 J6.1 J6.14 J7.1 J7.14 LED1001.C LED1002.C LED1003.C LED1007.C LED1008.C LED1009.C LED1013.C LED1014.C LED1015.C R13.2 R14.2 R15.2 R16.2 R17.2 R18.2 R19.2 R20.2 R21.2 R22.2 R23.2 R24.2 R50.1 R51.1 R52.1 R53.1 R54.1 R55.1 R56.1 R57.1 R58.1 R59.1 R60.1 R61.1 R62.1 R63.1 R64.1 R65.1 R66.1 R67.1 R68.1 R69.1 R70.1 R71.1 R72.1 R73.1 R74.1 R75.1 R76.1 R77.1 R78.1 R79.1 R80.1 R1004.1 R1005.1 R1006.1 R1010.1 R1011.1 R1012.1 R1016.1 R1017.1 R1018.1 S1.2 S1.PAD S2.2 S2.PAD S3.2 S3.PAD S4.2 S4.PAD S5.2 S5.PAD S6.2 S6.PAD S7.2 S8.2 S9.2 S10.2 S11.2 S12.2 S13.1 S13.PAD S14.1 S14.PAD S15.1 S15.PAD S16.1 S16.PAD S17.1 S17.PAD S18.1 S18.PAD TP4.TESTPOINT TP7.TESTPOINT TP11.TESTPOINT TP25.TESTPOINT TP26.TESTPOINT TP27.TESTPOINT U1.5 U1.10 U1.24 U1.43 U1.48 U2.4 U3.4 U4.4 U5.4 U6.4 U7.4 U8.4 U9.4 U10.4 U11.4 U12.4 U13.4 U14.4 U14.5 U15.4 U15.5 U16.4 U16.5 U17.4 U17.5 U18.4 U19.4 U19.5 U20.4 U20.10 U21.4 U21.10 U22.4 U22.10 U23.4 U23.10 U24.4 U24.10 U25.4 U25.10 U26.3 U26.4 U26.5 U26.9 U27.3 U27.4 U27.9 U28.3 U28.5 U28.9 U29.4 U29.9 U30.5 U30.9 U31.9
HUB_!OVRCUR1: R28.1 S14.5 TP33.TESTPOINT U1.12
HUB_!OVRCUR2: R27.1 S13.5 TP35.TESTPOINT U1.16
HUB_!OVRCUR3: R29.1 S15.5 TP37.TESTPOINT U1.20
HUB_!OVRCUR4: R31.1 S17.5 TP39.TESTPOINT U1.25
HUB_!OVRCUR5: U1.29
HUB_!OVRCUR6: R32.1 S18.5 TP41.TESTPOINT U1.33
HUB_!OVRCUR7: R30.1 S16.5 TP43.TESTPOINT U1.37
HUB_!PWRON1: S8.1 TP32.TESTPOINT U1.11
HUB_!PWRON2: S7.1 TP34.TESTPOINT U1.15
HUB_!PWRON3: S9.1 TP36.TESTPOINT U1.19
HUB_!PWRON4: S11.1 TP38.TESTPOINT U1.23
HUB_!PWRON5: U1.28
HUB_!PWRON6: S12.1 TP40.TESTPOINT U1.32
HUB_!PWRON7: S10.1 TP42.TESTPOINT U1.36
HUB_CFG: TP28.TESTPOINT U1.40
HUB_DM1: C6.1 R4.1 U1.13
HUB_DM2: C4.1 R2.1 U1.17
HUB_DM3: C8.1 R6.1 U1.21
HUB_DM4: C12.1 R10.1 U1.26
HUB_DM5: U1.30
HUB_DM6: C14.1 R12.1 U1.34
HUB_DM7: C10.1 R8.1 U1.38
HUB_DP1: C5.1 R3.1 U1.14
HUB_DP2: C3.1 R1.1 U1.18
HUB_DP3: C7.1 R5.1 U1.22
HUB_DP4: C11.1 R9.1 U1.27
HUB_DP5: U1.31
HUB_DP6: C13.1 R11.1 U1.35
HUB_DP7: C9.1 R7.1 U1.39
HUB_PORTDIS: TP30.TESTPOINT U1.42
HUB_PORTPWR: TP29.TESTPOINT U1.41
MOD0_5V: C33.1 J0.2 S1.1
MOD0_5V_METERED: C76.1 C88.1 J4.7 S1.3 S13.2 S13.3 TP16.TESTPOINT
MOD0_D+_HUB-SW: D1.4 R1.2 R50.2 U20.3
MOD0_D-_HUB-SW: D1.2 R2.2 R51.2 U20.5
MOD0_IN: J0.10 U8.7
MOD0_ISO_I2C: R63.2 R1002.2 TP1002.TESTPOINT U2.5 U26.11
MOD0_ISO_POWER: R62.2 R1001.2 S1.4 TP1001.TESTPOINT U26.10
MOD0_ISO_USB: R64.2 R1003.2 S7.6 TP1003.TESTPOINT U20.8 U26.12
MOD0_OUT: J0.8 U14.7
MOD0_PPS: J0.7 U8.6
MOD0_SCL: J0.5 R34.2 U2.6
MOD0_SDA: J0.6 R33.2 U2.7
MOD0_USB+: J0.11 U20.1
MOD0_USB-: J0.12 U20.7
MOD0_USB_!EN: S7.4 S13.4
MOD0_USB_VBUS: C77.1 C95.1 J0.13 S13.6 S13.7
MOD0_VCCIO: C22.1 C40.1 C52.1 J0.4 R33.1 R34.1 U2.8 U8.8 U14.8
MOD1_5V: C34.1 J1.2 S2.1
MOD1_5V_METERED: C78.1 C89.1 J4.8 S2.3 S14.2 S14.3 TP17.TESTPOINT
MOD1_D+_HUB-SW: D1.8 R3.2 R52.2 U21.3
MOD1_D-_HUB-SW: D1.6 R4.2 R53.2 U21.5
MOD1_IN: J1.10 U9.7
MOD1_ISO_I2C: LED1005.A R66.2 TP1005.TESTPOINT U3.5 U27.11
MOD1_ISO_POWER: LED1004.A R65.2 S2.4 TP1004.TESTPOINT U27.10
MOD1_ISO_USB: LED1006.A R67.2 S8.6 TP1006.TESTPOINT U21.8 U27.12
MOD1_OUT: J1.8 U15.7
MOD1_PPS: J1.7 U9.6
MOD1_SCL: J1.5 R36.2 U3.6
MOD1_SDA: J1.6 R35.2 U3.7
MOD1_USB+: J1.11 U21.1
MOD1_USB-: J1.12 U21.7
MOD1_USB_!EN: S8.4 S14.4
MOD1_USB_VBUS: C79.1 C96.1 J1.13 S14.6 S14.7
MOD1_VCCIO: C24.1 C42.1 C54.1 J1.4 R35.1 R36.1 U3.8 U9.8 U15.8
MOD2_5V: C35.1 J2.2 S3.1
MOD2_5V_METERED: C80.1 C90.1 J4.9 S3.3 S15.2 S15.3 TP18.TESTPOINT
MOD2_D+_HUB-SW: D2.8 R5.2 R54.2 U22.3
MOD2_D-_HUB-SW: D2.6 R6.2 R55.2 U22.5
MOD2_IN: J2.10 U10.7
MOD2_ISO_I2C: R69.2 R1008.2 TP1008.TESTPOINT U4.5 U28.11
MOD2_ISO_POWER: R68.2 R1007.2 S3.4 TP1007.TESTPOINT U28.10
MOD2_ISO_USB: R70.2 R1009.2 S9.6 TP1009.TESTPOINT U22.8 U28.12
MOD2_OUT: J2.8 U16.7
MOD2_PPS: J2.7 U10.6
MOD2_SCL: J2.5 R38.2 U4.6
MOD2_SDA: J2.6 R37.2 U4.7
MOD2_USB+: J2.11 U22.1
MOD2_USB-: J2.12 U22.7
MOD2_USB_!EN: S9.4 S15.4
MOD2_USB_VBUS: C81.1 C97.1 J2.13 S15.6 S15.7
MOD2_VCCIO: C26.1 C44.1 C56.1 J2.4 R37.1 R38.1 U4.8 U10.8 U16.8
MOD5_5V: C36.1 J5.2 S4.1
MOD5_5V_METERED: C82.1 C91.1 J4.10 S4.3 S16.2 S16.3 TP19.TESTPOINT
MOD5_D+_HUB-SW: D3.2 R7.2 R56.2 U23.3
MOD5_D-_HUB-SW: D3.4 R8.2 R57.2 U23.5
MOD5_IN: J5.10 U11.7
MOD5_ISO_I2C: LED1011.A R72.2 TP1011.TESTPOINT U5.5 U29.11
MOD5_ISO_POWER: LED1010.A R71.2 S4.4 TP1010.TESTPOINT U29.10
MOD5_ISO_USB: LED1012.A R73.2 S10.6 TP1012.TESTPOINT U23.8 U29.12
MOD5_OUT: J5.8 U17.7
MOD5_PPS: J5.7 U11.6
MOD5_SCL: J5.5 R40.2 U5.6
MOD5_SDA: J5.6 R39.2 U5.7
MOD5_USB+: J5.11 U23.1
MOD5_USB-: J5.12 U23.7
MOD5_USB_!EN: S10.4 S16.4
MOD5_USB_VBUS: C83.1 C98.1 J5.13 S16.6 S16.7
MOD5_VCCIO: C28.1 C46.1 C58.1 J5.4 R39.1 R40.1 U5.8 U11.8 U17.8
MOD6_5V: C37.1 J6.2 S5.1
MOD6_5V_METERED: C84.1 C92.1 J4.11 S5.3 S17.2 S17.3 TP20.TESTPOINT
MOD6_D+_HUB-SW: D4.8 R9.2 R58.2 U24.3
MOD6_D-_HUB-SW: D4.6 R10.2 R59.2 U24.5
MOD6_IN: J6.10 U12.7
MOD6_ISO_I2C: R75.2 R1014.2 TP1014.TESTPOINT U6.5 U30.11
MOD6_ISO_POWER: R74.2 R1013.2 S5.4 TP1013.TESTPOINT U30.10
MOD6_ISO_USB: R76.2 R1015.2 S11.6 TP1015.TESTPOINT U24.8 U30.12
MOD6_OUT: J6.8 U18.7
MOD6_PPS: J6.7 U12.6
MOD6_SCL: J6.5 R42.2 U6.6
MOD6_SDA: J6.6 R41.2 U6.7
MOD6_USB+: J6.11 U24.1
MOD6_USB-: J6.12 U24.7
MOD6_USB_!EN: S11.4 S17.4
MOD6_USB_VBUS: C85.1 C99.1 J6.13 S17.6 S17.7
MOD6_VCCIO: C30.1 C48.1 C60.1 J6.4 R41.1 R42.1 U6.8 U12.8 U18.8
MOD7_5V: C38.1 J7.2 S6.1
MOD7_5V_METERED: C86.1 C93.1 J4.12 S6.3 S18.2 S18.3 TP21.TESTPOINT
MOD7_D+_HUB-SW: D4.4 R11.2 R60.2 U25.3
MOD7_D-_HUB-SW: D4.2 R12.2 R61.2 U25.5
MOD7_IN: J7.10 U13.7
MOD7_ISO_I2C: LED1017.A R78.2 TP1017.TESTPOINT U7.5 U31.11
MOD7_ISO_POWER: LED1016.A R77.2 S6.4 TP1016.TESTPOINT U31.10
MOD7_ISO_USB: LED1018.A R79.2 S12.6 TP1018.TESTPOINT U25.8 U31.12
MOD7_OUT: J7.8 U19.7
MOD7_PPS: J7.7 U13.6
MOD7_SCL: J7.5 R44.2 U7.6
MOD7_SDA: J7.6 R43.2 U7.7
MOD7_USB+: J7.11 U25.1
MOD7_USB-: J7.12 U25.7
MOD7_USB_!EN: S12.4 S18.4
MOD7_USB_VBUS: C87.1 C100.1 J7.13 S18.6 S18.7
MOD7_VCCIO: C32.1 C50.1 C62.1 J7.4 R43.1 R44.1 U7.8 U13.8 U19.8
MOD_SCL: J3.24 R49.1 TP6.TESTPOINT U2.3 U3.3 U4.3 U5.3 U6.3 U7.3
MOD_SDA: J3.23 R48.1 TP5.TESTPOINT U2.2 U3.2 U4.2 U5.2 U6.2 U7.2
N$1: LED1001.A R1001.1
N$2: LED1002.A R1002.1
N$3: LED1003.A R1003.1
N$4: LED1007.A R1007.1
N$5: LED1008.A R1008.1
N$6: LED1009.A R1009.1
N$7: LED1013.A R1013.1
N$8: LED1014.A R1014.1
N$9: LED1015.A R1015.1
N$10: LED1004.C R1004.2
N$11: LED1005.C R1005.2
N$12: R25.2 U1.2
N$13: LED1006.C R1006.2
N$14: C2.2 R26.1 Y1.1
N$15: LED1010.C R1010.2
N$16: LED1011.C R1011.2
N$17: R13.1 U20.2
N$18: R24.1 U25.6
N$19: R23.1 U25.2
N$20: R22.1 U24.6
N$21: R21.1 U24.2
N$22: R20.1 U23.6
N$23: R19.1 U23.2
N$24: R17.1 U22.2
N$25: R18.1 U22.6
N$26: R16.1 U21.6
N$27: R15.1 U21.2
N$28: LED1012.C R1012.2
N$29: LED1016.C R1016.2
N$30: LED1017.C R1017.2
N$31: R14.1 U20.6
N$32: LED1018.C R1018.2
N$73: C1.2 U1.45 Y1.3
N$74: R26.2 U1.44
PPS: J3.25 TP10.TESTPOINT U8.3 U9.3 U10.3 U11.3 U12.3 U13.3
SMBCLK: J3.5 J4.5 R46.1 TP2.TESTPOINT U26.1 U27.1 U28.1 U29.1 U30.1 U31.1
SMBDATA: J3.3 J4.3 R45.1 TP1.TESTPOINT U26.2 U27.2 U28.2 U29.2 U30.2 U31.2
USB_SUSPEND_STATUS: TP31.TESTPOINT U1.1
VBATT+: J4.17 J9.1 TP14.TESTPOINT
VBATT-: J4.18 J9.2 TP15.TESTPOINT
VCC_BACKPLANE: C15.1 C16.1 C17.1 C18.1 C19.1 C20.1 C21.1 C23.1 C25.1 C27.1 C29.1 C31.1 C39.1 C41.1 C43.1 C45.1 C47.1 C49.1 C51.1 C53.1 C55.1 C57.1 C59.1 C61.1 C63.2 C64.2 C65.2 C66.2 C67.2 C68.2 C69.2 C70.1 C71.1 C72.1 C73.1 C74.1 C75.1 C94.2 J4.13 R27.2 R28.2 R29.2 R30.2 R31.2 R32.2 R45.2 R46.2 R47.2 R48.2 R49.2 S7.3 S7.5 S8.3 S8.5 S9.3 S9.5 S10.3 S10.5 S11.3 S11.5 S12.3 S12.5 TP8.TESTPOINT TP24.TESTPOINT U1.8 U1.9 U1.46 U1.47 U2.1 U3.1 U4.1 U5.1 U6.1 U7.1 U8.1 U8.5 U9.1 U9.5 U10.1 U10.5 U11.1 U11.5 U12.1 U12.5 U13.1 U13.5 U14.1 U15.1 U16.1 U17.1 U18.1 U19.1 U20.9 U21.9 U22.9 U23.9 U24.9 U25.9 U26.18 U27.5 U27.18 U28.4 U28.18 U29.3 U29.5 U29.18 U30.3 U30.4 U30.18 U31.3 U31.4 U31.5 U31.18
VCC_CONTROLLER: J3.2 J4.2 TP22.TESTPOINT
VCC_LINUX: J3.4 J4.4 TP23.TESTPOINT
VSOL+: J4.19 J8.1 TP12.TESTPOINT
VSOL-: J4.20 J8.2 TP13.TESTPOINT

## Tracks (layer width: path | path; a pad name or v marks a point on that pad's centre or on a via)
!BACKPLANE_RESET  (via drill 0.6)
  Top 0.203: U31.6 v132.72,68.83 | v130.43,68.83 v128.14,68.83 | v124.97,70.36 124.97,73.03 | v122.05,70.36 114.05,70.36 111.76,72.64 U30.6
  Top 0.254: J3.22 212.67,209.73 211.58,210.82 211.58,212.85 209.3,215.14 194.31,215.14 140.72,268.73 140.72,270 | v201.93,197.87 201.17,197.87 194.56,191.26 168.66,191.26 165.1,187.71 139.7,187.71 125.22,173.23 v125.22,172.34 | v125.22,170.05 124.84,169.67 124.84,161.8 v125.22,161.42 | v125.22,157.1 125.22,149.86 | 125.22,149.86 126.24,148.84 v127.89,148.84 | v130.68,148.84 v134.24,148.84 | v137.03,148.84 U29.6 | 125.22,149.86 125.22,144.78 v125.73,144.27 | v125.73,142.37 125.22,141.86 125.22,102.62 124.71,102.11 124.71,90.55 v124.97,90.3 | v124.97,88.01 v124.97,81.41 | v124.97,78.61 124.97,73.03 | 140.72,270 140.72,271.02 | 140.72,271.02 140.72,272.8 | 140.72,272.8 140.72,273.81 | 140.72,273.81 140.72,294.39 141.1,294.77 | 141.1,294.77 148.21,301.88 v148.21,305.18 | v153.29,305.18 155.7,307.59 U27.6 | 141.1,294.77 v141.1,296.04 | v137.39,295.02 137.29,295.02 136.4,294.13 120.65,294.13 v120.02,294.77 | v117.47,294.77 116.84,294.13 115.06,294.13 v114.43,294.77 | v112.14,294.77 104.78,294.77 | 104.78,294.77 104.39,295.15 U26.6 | U28.6 v102.11,290.83 | v104.14,294.13 104.78,294.77 | R80.2 141.22,270.51 | 141.22,270.51 140.72,270 | 141.22,270.51 140.72,271.02 | v125.73,176.78 125.73,179.32 122.17,182.88 v122.17,184.53 | v121.67,190.25 U1.6 | TP9.TESTPOINT 141.22,273.3 | 141.22,273.3 140.72,272.8 | 141.22,273.3 140.72,273.81
  Bottom 0.203: v132.72,68.83 v130.43,68.83 | v128.14,68.83 126.49,68.83 v124.97,70.36 v122.05,70.36
  Bottom 0.254: J3.22 212.78,209.73 209.55,206.5 209.55,205.49 v201.93,197.87 | v125.22,170.05 v125.22,172.34 125.22,176.28 v125.73,176.78 | v125.22,161.42 v125.22,157.1 | v127.89,148.84 v130.68,148.84 | v134.24,148.84 v137.03,148.84 | v125.73,144.27 v125.73,142.37 | v124.97,90.3 v124.97,88.01 | v124.97,81.41 v124.97,78.61 | v148.21,305.18 v153.29,305.18 | v141.1,296.04 141.1,295.66 140.46,295.02 v137.39,295.02 | v120.02,294.77 v117.47,294.77 | v114.43,294.77 v112.14,294.77 | v102.11,290.83 102.11,292.1 v104.14,294.13 | v121.67,190.25 121.67,185.04 v122.17,184.53
!SMBALERT  (via drill 0.6)
  Top 0.254: J3.6 214.2,265.61 214.63,265.18 214.63,201.93 197.36,184.66 196.09,184.66 | 196.09,184.66 171.45,184.66 167.89,181.1 142.49,181.1 135.38,173.99 135.38,172.85 v134.87,172.34 | v93.22,160.02 92.71,159.51 58.42,159.51 52.58,165.35 52.58,168.71 J4.6 | v106.3,159.51 134.62,159.51 135.64,160.53 135.64,168.78 v134.37,170.05 | v97.28,160 97.77,159.51 v104.01,159.51 | 196.09,184.66 v196.98,185.55 | v199.39,183.64 200.04,184.29 R47.1 204.58,184.29 205.23,183.64 214.12,183.64 TP3.TESTPOINT
  Bottom 0.254: v134.87,172.34 134.87,170.56 v134.37,170.05 | v93.22,160.02 93.83,160.02 94.08,159.77 96.47,159.77 96.7,160 v97.28,160 | v106.3,159.51 v104.01,159.51 | v196.98,185.55 198.88,183.64 v199.39,183.64
CONT_MOD0_IN  (via drill 0.6)
  Top 0.254: J3.9 209.07,285.22 202.44,291.85 141.86,291.85 v141.6,291.59 | v138.3,291.59 138.68,291.97 138.68,328.93 131.06,336.55 120.4,336.55 v120.02,336.17 | U8.2 104.14,336.55 v104.52,336.17 | v109.35,336.17 109.73,336.55 111.76,336.55 v112.14,336.17 | v114.43,336.17 114.81,336.55 117.35,336.55 v117.73,336.17
  Bottom 0.254: v141.6,291.59 v138.3,291.59 | v104.52,336.17 104.9,336.55 108.97,336.55 v109.35,336.17 | v112.14,336.17 112.52,336.55 114.05,336.55 v114.43,336.17 | v117.73,336.17 118.11,336.55 119.63,336.55 v120.02,336.17
CONT_MOD0_OUT  (via drill 0.6)
  Top 0.254: J3.10 209.07,265.66 207.77,266.95 207.77,268.73 208.53,269.49 208.53,284.99 202.18,291.34 142.62,291.34 v141.6,290.32 | v138.3,290.32 138.3,290.47 137.49,291.29 137.49,291.9 138.18,292.58 138.18,328.68 130.81,336.04 125.22,336.04 v124.33,335.15 | v109.35,343.41 v112.14,343.41 | v114.43,343.41 v117.73,343.41 | v104.52,343.41 U14.2 | v124.33,337.95 124.33,339.09 v120.02,343.41
  Bottom 0.254: v141.6,290.32 v138.3,290.32 | v104.52,343.41 v109.35,343.41 | v112.14,343.41 v114.43,343.41 | v117.73,343.41 v120.02,343.41 | v124.33,335.15 v124.33,337.95
CONT_MOD1_IN  (via drill 0.6)
  Top 0.254: J3.11 206.53,268.25 208.03,269.75 208.05,284.71 201.93,290.83 166.62,290.83 v166.12,290.32 | v148.46,314.96 148.59,315.09 148.59,327.15 v150.62,329.18 | v152.15,334.26 151.64,334.77 151.64,345.19 156.21,349.76 156.72,349.76 v157.23,349.25 | U9.2 v157.23,351.54 | v166.12,294.13 165.86,294.13 165.35,294.64 162.05,294.64 151.64,305.05 151.64,312.67 v152.91,313.94
  Bottom 0.254: v166.12,290.32 v166.12,294.13 | v150.62,329.18 150.62,330.2 151.64,331.22 151.64,333.76 v152.15,334.26 | v157.23,349.25 v157.23,351.54 | v152.91,313.94 152.65,313.94 151.64,314.96 v148.46,314.96
CONT_MOD1_OUT  (via drill 0.6)
  Top 0.254: J3.12 206.53,265.66 205.23,266.95 205.23,268.73 207.52,271.02 207.52,284.48 201.68,290.32 167.39,290.32 v166.12,289.05 | v149.61,329.95 149.61,328.93 148.08,327.41 148.08,315.98 147.57,315.47 v147.57,313.94 | v152.65,335.53 152.15,336.04 152.15,341.12 156.71,345.69 U15.2 | v164.85,293.75 164.72,293.75 164.34,293.37 162.56,293.37 151.13,304.8 151.13,313.44 v151.51,313.82
  Bottom 0.254: v166.12,289.05 165.1,290.07 165.1,290.58 165.61,291.08 165.61,292.99 v164.85,293.75 | v149.61,329.95 151.13,331.47 151.13,334.77 151.89,335.53 v152.65,335.53 | v151.51,313.82 151.38,313.94 v147.57,313.94
CONT_MOD2_IN  (via drill 0.6)
  Top 0.254: J3.13 203.99,267.49 202.69,266.19 202.69,264.92 189.99,252.22 159.77,252.22 159.51,252.48 158.37,252.48 v158.24,252.35 | U10.2 111.76,239.02 v112.14,238.63 | v114.43,238.63 114.81,239.01 117.35,239.01 v117.73,238.63 | v120.02,238.63 120.4,239.01 124.71,239.01 v125.09,238.63 | v127.38,238.63 127,239.01 127,249.68 127.38,250.06 128.27,250.06 128.65,249.68 155.57,249.68 v155.96,250.06
  Bottom 0.254: v112.14,238.63 v114.43,238.63 | v117.73,238.63 v120.02,238.63 | v125.09,238.63 v127.38,238.63 | v155.96,250.06 v158.24,252.35
CONT_MOD2_OUT  (via drill 0.6)
  Top 0.254: J3.14 203.99,265.45 190.25,251.71 159.26,251.71 v159.13,251.59 | v112.14,249.18 v112.14,249.17 v109.86,249.17 | v114.43,249.17 v117.73,249.17 | v120.02,249.17 v125.09,249.17 | v127.89,249.17 v156.72,249.17 | U16.2 v107.56,249.18 v107.57,249.17
  Bottom 0.254: v112.14,249.17 v114.43,249.17 | v117.73,249.17 v120.02,249.17 | v125.09,249.17 v127.89,249.17 | v156.72,249.17 v159.13,251.59 | v107.57,249.17 v109.86,249.17
CONT_MOD5_IN  (via drill 0.6)
  Top 0.254: J3.15 205.74,272.44 205.74,280.8 v206.63,281.69 | v210.95,281.69 221.49,271.14 221.49,265.43 236.47,250.44 236.47,205.49 245.36,196.6 v245.75,196.6 | v244.22,190.75 240.54,190.75 176.78,127 151.89,127 146.81,132.08 146.81,143.89 v146.43,144.27 | U11.2 150.88,143.76 150.37,144.27 v149.22,144.27
  Bottom 0.254: v206.63,281.69 v210.95,281.69 | v245.75,196.6 244.86,195.71 244.86,191.39 v244.22,190.75 | v146.43,144.27 v149.22,144.27
CONT_MOD5_OUT  (via drill 0.6)
  Top 0.254: J3.16 202.69,266.85 202.69,268.73 206.63,272.67 v206.63,280.42 | v210.95,280.42 220.98,270.38 220.98,265.18 235.97,250.19 235.97,205.23 245.75,195.45 v246.13,195.45 | v245.11,189.87 240.41,189.87 177.04,126.49 151.64,126.49 146.3,131.83 146.3,143.26 145.54,144.02 145.54,144.78 146.81,145.54 146.81,149.22 v146.43,149.61 | v149.22,149.61 149.48,149.61 150.5,150.62 U17.2
  Bottom 0.254: v206.63,280.42 v210.95,280.42 | v246.13,195.45 245.36,194.82 245.36,190.12 v245.11,189.87 | v146.43,149.61 v149.22,149.61
CONT_MOD6_IN  (via drill 0.6)
  Top 0.254: U12.2 103.37,48.01 103.38,48.01 105.79,48.01 107.06,46.74 107.95,46.74 108.2,46.99 139.95,46.99 147.57,39.37 147.57,12.95 145.16,10.54 v145.16,6.22 | v147.19,4.19 147.57,3.81 158.75,3.81 162.56,7.62 165.61,7.62 169.42,3.81 242.32,3.81 250.19,11.68 250.19,88.39 246.38,92.2 246.38,95 250.19,98.81 250.19,182.12 v249.68,182.63 | v252.98,185.8 253.24,186.06 253.24,192.79 246.89,199.14 245.87,199.14 238.51,206.5 238.51,251.46 223.52,266.45 223.52,274.32 v217.42,280.42 | J3.17 198.91,268.5 203.96,273.56 203.96,280.8 v204.85,281.69
  Bottom 0.254: v145.16,6.22 v147.19,4.19 | v249.68,182.63 249.81,182.63 v252.98,185.8 | v204.85,281.69 203.96,280.8 203.96,279.91 204.98,278.89 215.9,278.89 v217.42,280.42
CONT_MOD6_OUT  (via drill 0.6)
  Top 0.254: U18.2 101.22,55.63 v107.44,49.4 | v148.46,5.33 149.48,4.32 158.5,4.32 162.31,8.13 165.86,8.13 169.67,4.32 242.06,4.32 249.68,11.94 249.68,88.14 245.87,91.95 245.87,95.25 249.68,99.06 249.68,181.1 248.79,181.99 v248.79,183.51 | v252.35,186.82 252.78,187.25 252.78,192.48 246.63,198.63 245.62,198.63 238,206.25 238,251.21 223.01,266.19 223.01,273.56 v216.15,280.42 | J3.18 198.91,265.96 200.15,267.21 200.15,268.73 204.85,273.43 v204.85,280.42 | v146.43,7.37 146.81,7.37 148.08,8.64 148.08,39.62 140.21,47.5 107.57,47.5 v107.44,47.62
  Bottom 0.254: v107.44,49.4 v107.44,47.62 | v146.43,7.37 v148.46,5.33 | v248.79,183.51 249.05,183.51 v252.35,186.82 | v204.85,280.42 204.85,280.29 205.74,279.4 215.14,279.4 v216.15,280.42
CONT_MOD7_IN  (via drill 0.6)
  Top 0.254: v210.95,282.96 222,271.91 222,265.68 236.98,250.7 236.98,205.74 245.11,197.61 246.13,197.61 248.03,195.71 v248.03,191.9 | U13.2 154.18,57.4 154.43,57.15 154.43,55.88 153.67,55.12 152.65,55.12 151.64,54.1 151.64,51.94 v151.89,51.69 | v151.89,48.64 152.02,48.64 154.43,46.23 155.07,46.23 v155.96,45.34 | v155.96,42.55 156.34,42.93 188.72,42.93 224.28,78.49 227.58,78.49 248.67,99.57 248.67,180.59 247.01,182.25 v247.01,185.29 | v206.63,282.96 204.85,282.96 203.2,281.31 203.2,274.98 J3.19
  Bottom 0.254: v151.89,51.69 v151.89,48.64 | v155.96,45.34 v155.96,42.55 | v247.01,185.29 247.01,185.8 248.03,186.82 v248.03,191.9 | v210.95,282.96 v206.63,282.96
CONT_MOD7_OUT  (via drill 0.6)
  Top 0.254: v210.95,284.23 222.5,272.67 222.5,265.94 237.49,250.95 237.49,205.99 245.36,198.12 246.38,198.12 252.32,192.18 252.32,188.7 v251.84,188.21 | U19.2 152.9,64.26 150.37,61.72 150.37,58.04 v150.62,57.78 | v150.62,56.01 150.62,55.88 150.37,55.63 150.37,51.94 v150.62,51.69 | v150.75,48.9 150.75,48.39 151.89,47.24 152.65,47.24 v154.56,45.34 | v154.56,42.55 155.45,41.66 156.34,41.66 157.1,42.42 188.98,42.42 224.54,77.98 227.84,77.98 249.17,99.31 249.17,180.85 247.9,182.12 v247.9,184.4 | v206.63,284.23 205.49,284.23 202.69,281.43 202.69,275.08 196.85,269.24 195.83,269.24 195.07,268.48 195.07,266.9 J3.20
  Bottom 0.254: v150.62,57.78 v150.62,56.01 | v150.62,51.69 150.62,49.02 v150.75,48.9 | v154.56,45.34 v154.56,42.55 | v247.9,184.4 248.03,184.4 v251.84,188.21 | v210.95,284.23 v206.63,284.23
CONT_USB+
  Top 0.254: 123.19,188.72 121.41,188.72 121.38,188.75 U1.3 | 123.19,188.72 128.02,188.72 134.11,194.82 192.79,194.82 206.5,208.53 206.5,211.02 J3.27 | R25.1 123.84,188.07 123.19,188.72
CONT_USB-
  Top 0.254: U1.4 121.18,189.25 121.41,189.23 127.76,189.23 133.86,195.33 192.53,195.33 205.26,208.05 J3.28
GND  (via drill 0.6)
  Top 0.203: U20.10 106.03,361.3 | U20.4 v109.98,361.7 v111.25,361.7 112.01,361.7 112.08,361.62 D1.3 | U21.4 v121.92,362.2 | D1.5 118.98,360.32 | 118.98,360.32 v119.63,359.66 | 118.98,360.32 118.98,360.28 v118.36,359.66 | U21.10 126.13,362.6 126.24,362.71 v126.24,363.47 | U3.4 158.1,338.18 | U25.4 v146.3,89.15 | U24.4 v97.92,88.52 | U7.4 154.16,49.89 | U5.4 154.29,136.25 154.05,136.02 | U23.10 156.09,175.4 | v152.91,174.75 U23.4 v151.64,174.75 | U25.10 150.26,89.55 150.37,89.66 | U6.4 98.95,63.65 | U24.10 94.22,88.12 93.85,87.76 v93.85,87.25 | U22.4 v96.77,228.73 | C66.1 90.28,227.82 v90.17,227.71 v91.69,227.71 92.31,228.33 U22.10 | U4.4 103.78,259.99 v104.39,260.6 | U2.4 97.68,350.67 v98.04,351.03
  Top 0.254: 106.03,361.3 105.52,360.79 C64.1 103.27,360.79 v103.12,360.93 102.87,360.93 v102.11,361.7 | D1.1 113.18,363.58 | 113.18,363.58 v112.52,364.24 | 113.18,363.58 113.39,363.58 v114.05,364.24 | D1.7 120.58,362.27 v120.65,362.2 v121.92,362.2 | v126.24,363.47 126.38,363.62 C65.1 128.67,363.62 v128.78,363.73 | C78.2 v149.1,359.92 149.61,359.41 v150.37,359.41 150.88,358.9 | S14.1 150.93,358.85 150.88,358.9 | 150.88,358.9 151.38,359.41 v152.15,359.41 152.91,358.65 | S14.PAD 152.91,358.65 | v153.67,359.41 152.91,358.65 | C42.2 162.96,354.73 v163.07,354.84 | C79.2 v163.83,361.19 | C53.2 v155.7,347.98 | C54.2 162.45,348.88 v162.56,349 | U9.4 158.47,349.53 v158.5,349.5 | C23.2 v156.21,341.38 | U15.4 v157.24,344.69 v157.23,344.68 | U15.5 v162.8,344.69 v162.81,344.68 | C34.2 164.48,334.15 v164.59,334.26 | R66.1 157.88,335.65 v157.73,335.53 | 158.1,338.18 v157.48,337.57 | C16.2 v151.89,324.36 | R13.2 v107.7,354.58 | R14.2 v107.7,368.55 | R50.1 v110.49,357.38 | R51.1 v110.49,366.01 | R16.2 v124.46,354.58 | R15.2 v124.46,368.55 | R53.1 v121.41,357.89 | R52.1 v121.41,366.78 | R57.1 v150.88,170.69 149.61,170.69 | C24.2 159.12,342.53 v159,342.65 | C28.2 158.35,140.1 v158.5,139.95 | C27.2 153.56,140.1 v153.42,139.95 | C46.2 158.86,146.95 v159,146.81 | C45.2 154.8,146.95 v154.94,146.81 | C58.2 159.4,154.57 v159.77,154.18 | C73.2 149.97,154.04 v149.86,153.92 | v146.3,152.4 C18.2 | v137.16,145.03 U29.9 | v137.16,151.38 U29.4 | v158.5,156.21 157.08,156.21 R73.1 | R71.1 v159,132.33 | C36.2 159.4,130.95 v159.51,131.06 | R56.1 v146.81,176.02 | R19.2 v151.13,176.78 | D4.3 108.13,89.22 v108.2,89.28 v109.47,89.28 | D4.7 99.24,88.58 v99.19,88.52 v97.92,88.52
  Top 0.254: v154.18,84.07 R79.1 | C32.2 157.62,54.24 v157.73,54.36 | C31.2 152.77,53.74 v152.65,53.85 | R77.1 v152.65,39.62 | R78.1 v157.73,47.75 | 154.16,49.89 v153.67,49.4 | U13.4 152.92,56.4 v152.53,56.01 | C38.2 150.73,45.1 | 150.73,45.1 v150.75,45.09 151,45.09 151.73,44.36 S6.2 | C87.2 v164.34,81.79 | C100.2 160.78,84.07 | 160.78,84.07 v161.54,84.58 | 160.78,84.07 v160.02,84.58 | C50.2 158.74,61.1 v159,60.83 | v156.08,59.94 C49.2 | U19.5 157.85,63.26 v157.86,63.25 | U19.4 153.3,63.26 v152.78,62.48 | C61.2 150.86,63.87 v150.62,63.37 | C91.2 152.16,131.97 v152.15,131.95 | v153.16,135.38 153.42,135.38 154.05,136.02 | U11.4 153.17,142.76 v152.65,142.24 | U17.4 152.41,149.62 v152.4,149.61 | U17.5 157.98,149.62 v157.99,149.61 | C83.2 v160.53,165.35 | C98.2 156.97,167.64 | 156.97,167.64 v157.73,168.4 | 156.97,167.64 v156.21,168.4 | 156.09,175.4 v156.72,176.02 | C67.1 159.12,176.26 v159.13,176.28 | D3.7 149.28,171.78 149.61,171.45 149.61,170.69 | D3.5 149.39,170.47 149.61,170.69 | R20.2 v154.69,169.93 | D3.3 140.9,171.12 v140.84,171.2 v139.57,171.2 | C2.1 113.41,181.61 v112.52,180.72 | U1.48 119.87,186.2 v120.78,186.18 | U1.5 118.88,189.75 v118.87,189.74 | U1.10 118.9,192.25 v118.87,192.28 | U1.24 113.33,193.63 v113.41,193.55 | S16.PAD 150.16,162.77 S16.1 148.38,162.77 148.08,163.07 v148.08,163.83 | C57.2 152,151.78 v152.15,151.64 | S10.2 151.51,156.97 v151.26,156.72 | v150.5,90.3 150.5,89.79 150.37,89.66 | C69.1 v154.18,89.15 | U31.9 v136.91,65.02 | C20.2 v140.72,77.98 | v149.61,73.15 150.16,72.6 S18.1 151.93,72.6 S18.PAD | C86.2 v145.8,71.88 | C75.2 v147.32,70.36 | C62.2 159.27,68.47 v159.64,68.07 | S12.2 v154.31,67.82 | C93.2 v145.54,43.94
  Top 0.254: C13.2 v106.43,184.91 | C14.2 107.39,188.65 v107.44,188.59 | C11.2 108.76,191.34 v108.84,191.26 | C12.2 108.79,193.85 v108.84,193.8 | C7.2 105.99,202.77 v105.92,202.69 | C8.2 108.89,203.28 v109.47,202.69 | C3.2 111.83,202.77 v111.76,202.69 | C4.2 114.73,202.74 v114.68,202.69 | C5.2 117.42,202.77 v117.35,202.69 | C6.2 120.32,202.77 v120.4,202.69 | R24.2 146.67,84.98 v146.69,84.71 | R23.2 146.67,93.58 v146.69,93.6 | C92.2 v32,95.76 | v32,90.68 C37.2 | R75.1 v97.79,67.31 | v96.52,59.18 C30.2 | v101.35,60.71 C29.2 | 98.95,63.65 v99.57,64.26 | v93.98,44.83 95.23,44.83 C48.2 | v99.57,44.83 100.82,44.83 C47.2 | v99.57,52.45 100.82,52.45 C59.2 | v93.98,52.45 95.23,52.45 C60.2 | v102.62,68.83 C19.2 | v111.51,71.37 U30.5 | v111.51,76.45 U30.9 | C68.1 91.81,87.77 v92.33,87.25 | C74.2 44.44,97.3 v44.32,97.41 | v94.74,92.84 96,92.84 R22.2 | R21.2 97.39,84.69 v97.41,84.71 | U12.4 99.94,49.01 v100.58,49.66 | U18.4 100.83,56.63 v100.84,56.64 | S11.2 v51.18,96.01 | C85.2 v42.42,87.12 | C99.2 44.45,90.42 | 44.45,90.42 v45.21,91.19 | v45.21,89.66 44.45,90.42 | S17.PAD 39.58,96.73 S17.1 39.58,98.51 39.88,98.81 40.39,98.81 v40.64,98.55 40.78,98.69 C84.2 v41.91,99.82 | R74.1 25.51,93.58 v25.53,93.6 | v52.83,97.28 R76.1 | D2.7 98.1,228.78 v98.04,228.73 v96.77,228.73 | R17.2 96.5,224.9 v96.52,224.92 | R18.2 96.5,232.81 v96.52,232.79 | C44.2 v100.33,234.31 | v104.9,234.31 C43.2 | v104.9,244.47 C55.2 | v100.33,244.47 C56.2 | C26.2 v101.35,254.89 | C25.2 v103.89,254.89 | v43.43,281.69 C81.2 | v32.51,282.19 33.27,282.96 | 33.27,282.96 C97.2 | 33.27,282.96 v32.51,283.72 | v59.94,282.45 C72.2 | C80.2 58.05,283.61 v57.91,283.46 | v55.12,282.19 54.57,282.74 S15.1 52.54,282.74 52.07,283.21